# Altium PCB PCB4.PcbDoc (part 1 of 3)
Units mm, origin at the board's own origin, x right, y up, seen from the top; angles counter-clockwise.
Board outline 75.87 x 93.52 mm, 2 copper layers (Top Layer, Bottom Layer); 206 components, 153 nets, 707 pads, 254 vias.
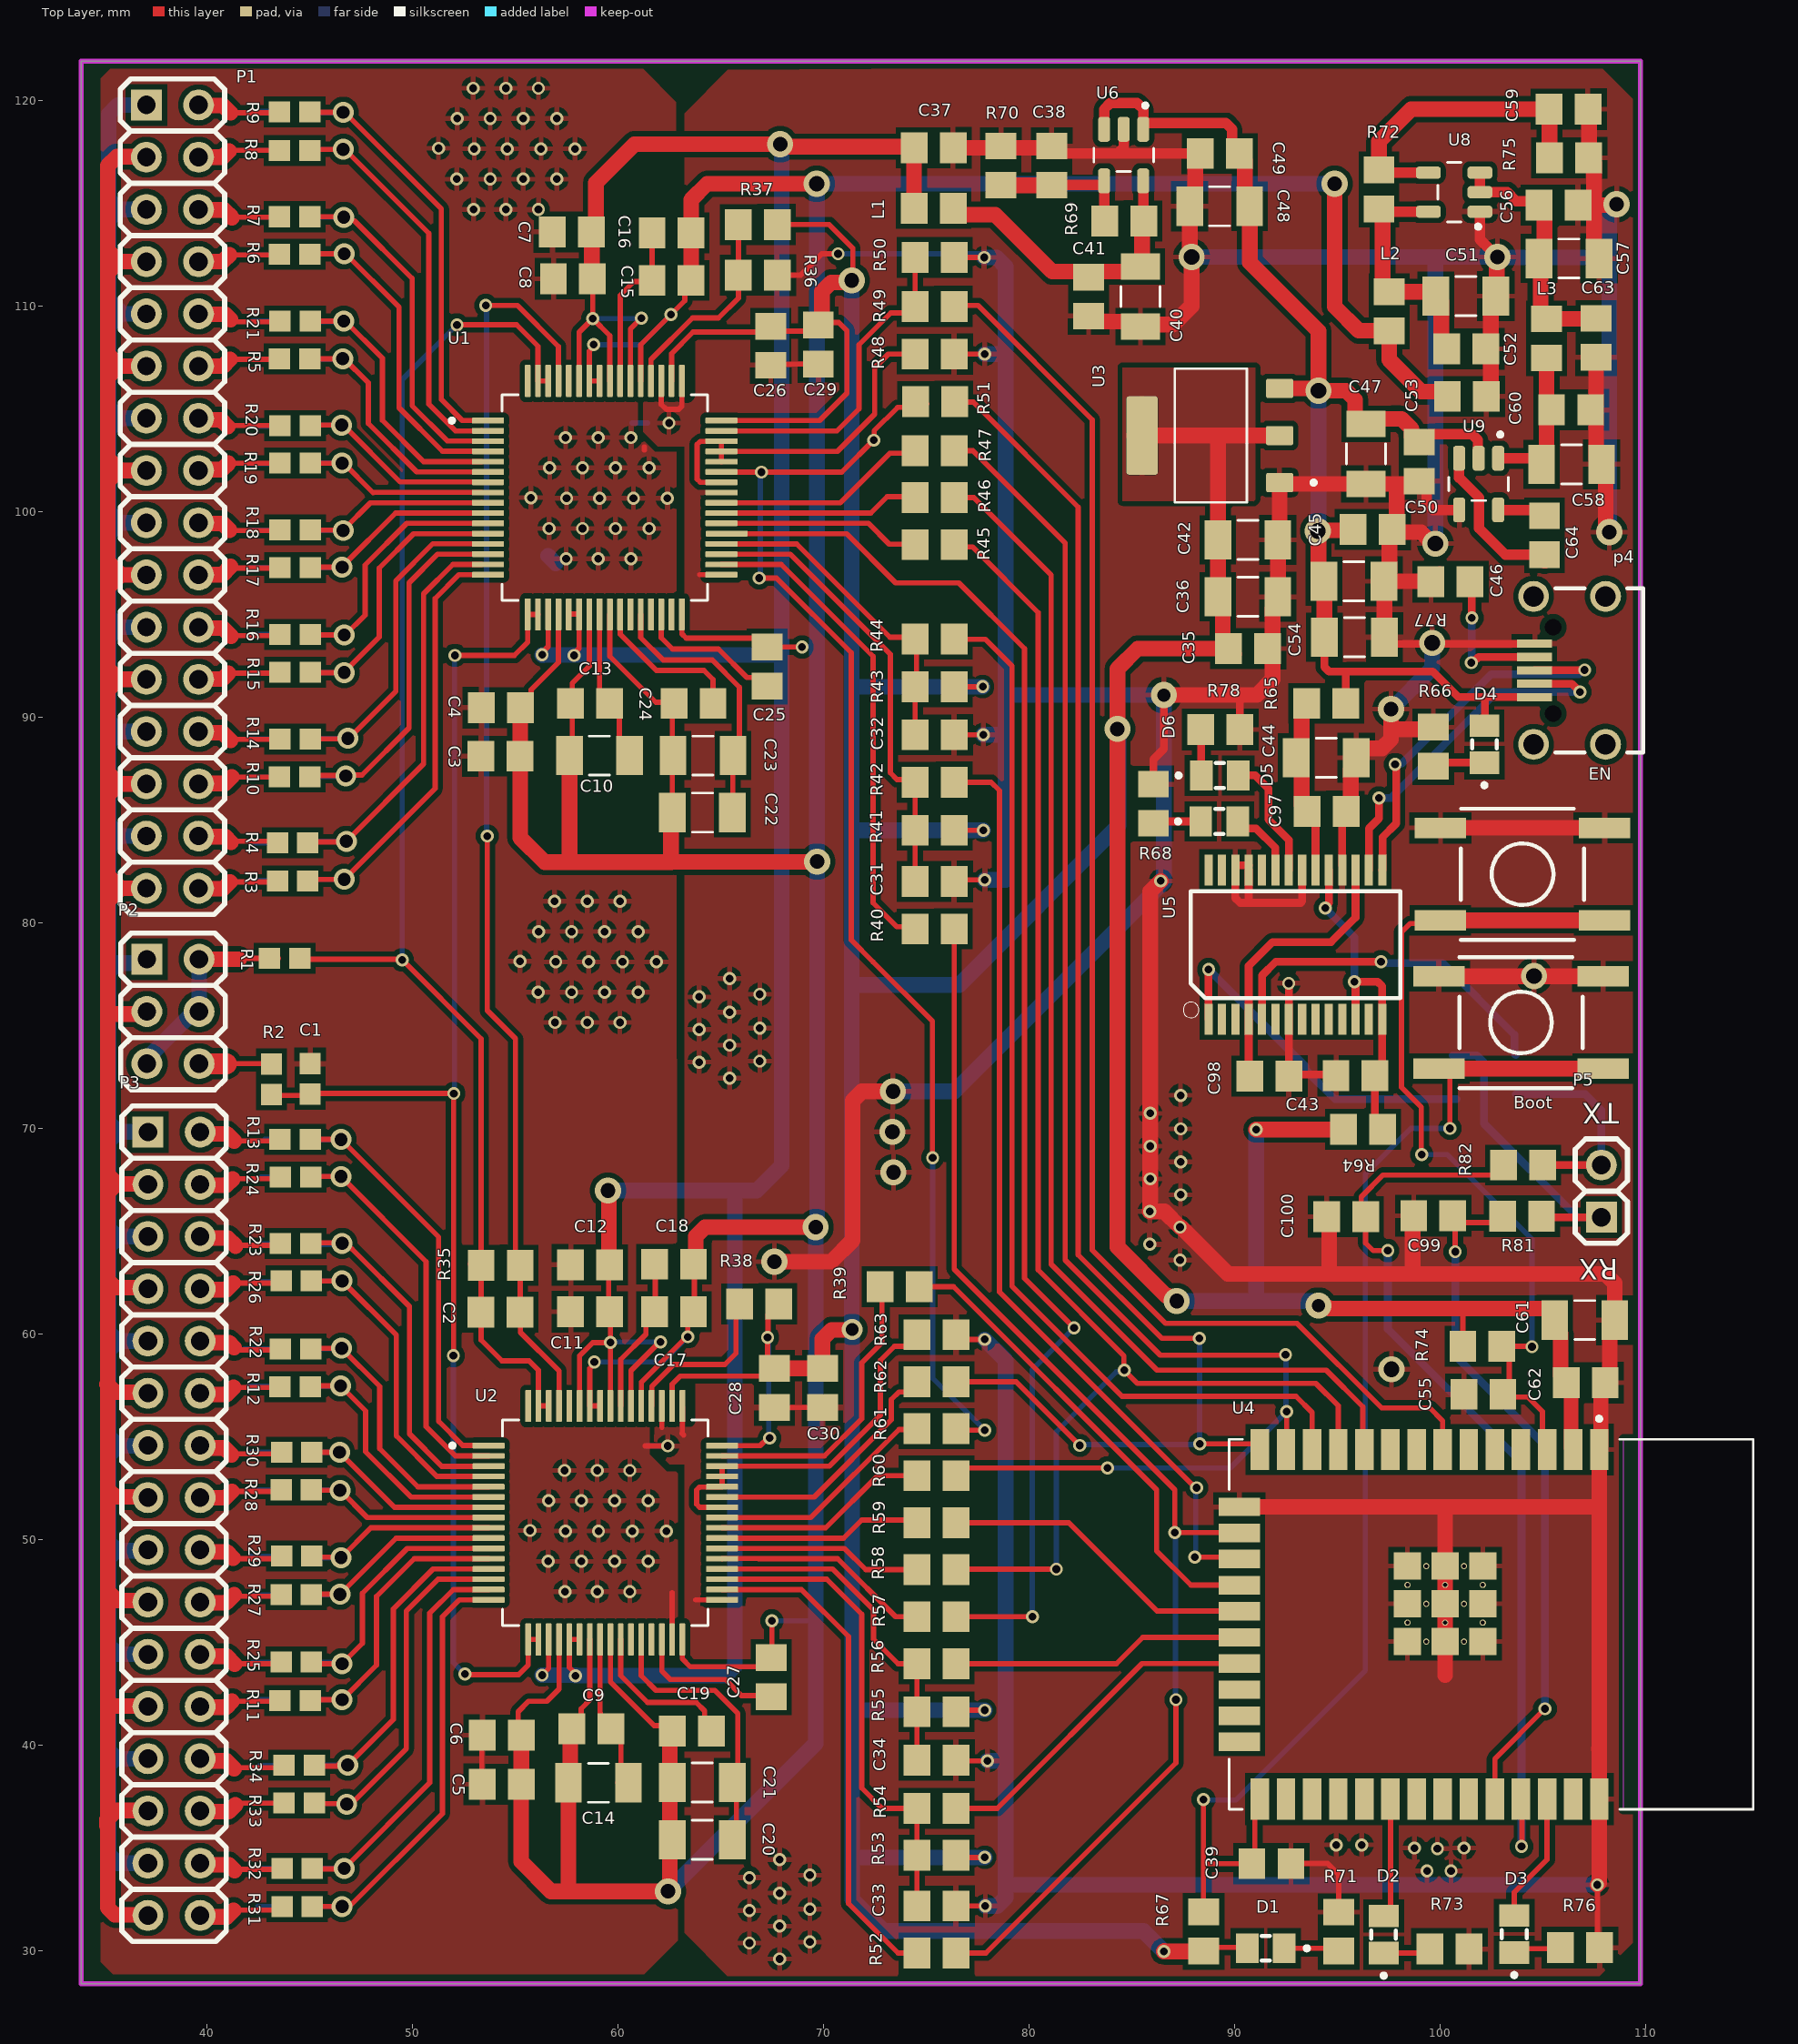
[diagram p0: Top Layer view]
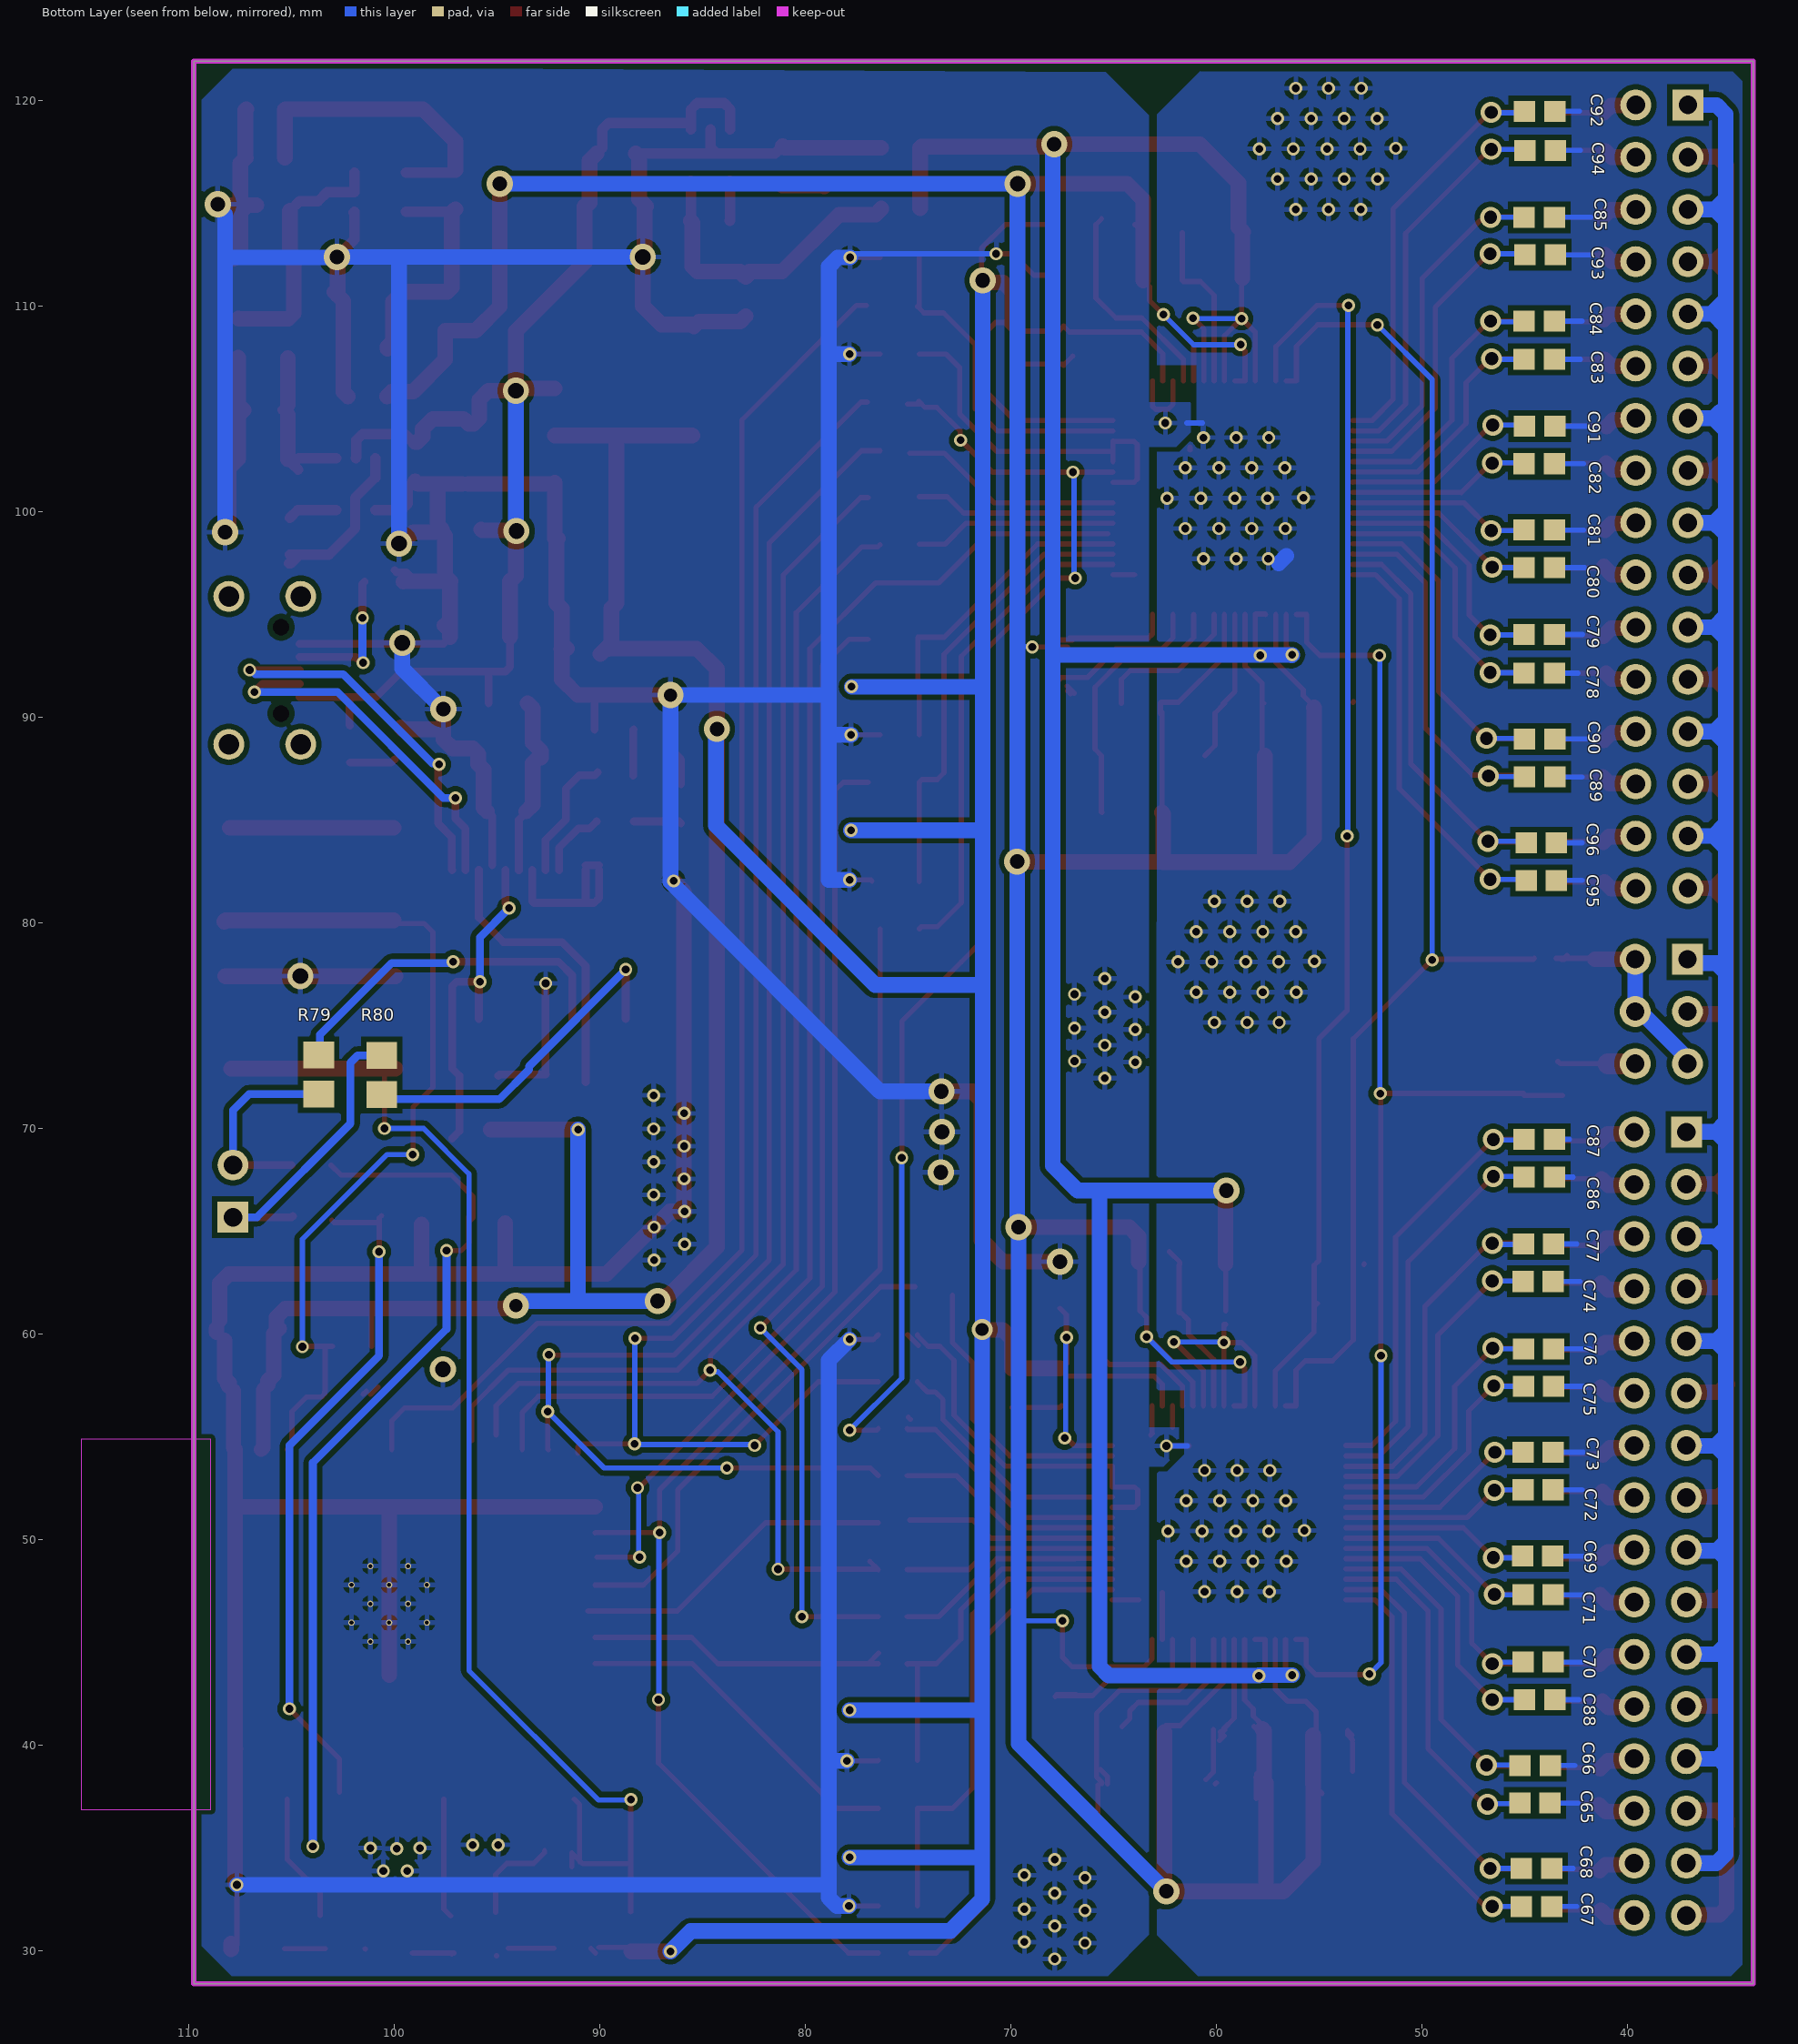
[diagram p1: Bottom Layer view, seen from below]

## Layer stack, top to bottom
Top Solder: solder mask 0.0102, Solder Resist, Dk 3.5
Top Layer: signal copper 0.0356
Dielectric 1: dielectric 0.32, FR-4, Dk 4.8
Bottom Layer: signal copper 0.0356
Bottom Solder: solder mask 0.0102, Solder Resist, Dk 3.5

## Board outline
33.884,28.372 33.884,121.895 109.753,121.895 109.753,28.372

## Design rules (kind name [scope] priority, off if disabled: settings)
Clearance [All] p1: gap=0.254 ignorepadtopadclearanceinfootprint=FALSE except(0: Arc-Hole Track-Hole SMDPad-Hole THPad-Hole Via-Hole Fill-Hole Poly-Hole Region-Hole Text-Hole)
PlaneConnect [InNet('GND')] p1: planeconnectstyle=Relief reliefexpansion=0.508 reliefentries=2 reliefconductorwidth=0.254 reliefairgap=0.254
PolygonConnect [InNet('GND')] p1: connectstyle=Relief reliefconductorwidth=0.254 reliefentries=4 polygonreliefangle="90 Angle" airgapwidth=0.254
RoutingVias [All] p1: holewidth=0.711 width=1.27 viastyle="Through Hole" minholewidth=0.381 minwidth=0.635 maxholewidth=0.711 maxwidth=1.27
SolderMaskExpansion [All] p1: expansion=0.102 istentingtop=FALSE
Width [All] p1: maxlimit=1.016 minlimit=0.254 preferedwidth=0.254 minimp=50.000000 maximp=50.000000 favimp=50.000000
29 further rules are at their usual default settings.

## Components (designator, comment, footprint, x,y, rotation, side; value= is the part's Value field where it differs from the comment)
Boot "SW-PB" SW-PB 103.937,75.133 r0 top
C1 "4.7nF" RESC1607X60N 45.034,72.392 r90 top
C2 "0.1uF" CAPC2012X135N 54.28,61.036 r0 top
C3 "1uF" CAPC2012X135N 54.28,88.087 r180 top
C4 "0.1uF" CAPC2012X135N 54.305,90.449 r180 top
C5 "0.1uF" CAPC2012X135N 54.348,38.078 r180 top
C6 "1uF" CAPC2012X135N 54.348,40.466 r180 top
C7 "1uF" CAPC2012X135N 57.76,113.589 r180 top
C8 "0.1uF" CAPC2012X135N 57.81,111.303 r180 top
C9 "10uF" CAPC3216X190N 59.055,38.151 r180 top
C10 "10uF" CAPC3216X190N 59.106,88.113 r180 top
C11 "1uF" CAPC2012X135N 58.647,61.062 r180 top
C12 "0.1uF" CAPC2012X135N 58.647,63.348 r180 top
C13 "0.1uF" CAPC2012X135N 58.649,90.653 r180 top
C14 "0.1uF" CAPC2012X135N 58.71,40.767 r180 top
C15 "0.1uF" CAPC2012X135N 62.611,111.227 r0 top
C16 "1uF" CAPC2012X135N 62.611,113.538 r0 top
C17 "0.1uF" CAPC2012X135N 62.728,61.062 r0 top
C18 "1uF" CAPC2012X135N 62.728,63.373 r0 top
C19 "1uF" CAPC2012X135N 63.602,40.665 r180 top
C20 "47uf" CAPC3216X190N 64.106,35.374 r180 top
C21 "47uf" CAPC3216X190N 64.106,38.168 r180 top
C22 "47uf" CAPC3216X190N 64.11,85.344 r180 top
C23 "47uf" CAPC3216X190N 64.135,88.113 r180 top
C24 "1uF" CAPC2012X135N 63.678,90.653 r180 top
C25 "1uF" CAPC2012X135N 67.259,92.446 r90 top
C26 "1uF" CAPC2012X135N 67.437,108.052 r270 top
C27 "1uF" CAPC2012X135N 67.462,43.282 r90 top
C28 "1uF" CAPC2012X135N 67.615,57.353 r270 top
C29 "0.1uF" CAPC2012X135N 69.748,108.102 r270 top
C30 "0.1uF" CAPC2012X135N 69.952,57.353 r270 top
C31 "0.1uF" CAPC2012X135N 75.413,81.991 r0 top
C32 "0.1uF" CAPC2012X135N 75.413,89.129 r0 top
C33 "0.1uF" CAPC2012X135N 75.504,32.156 r0 top
C34 "0.1uF" CAPC2012X135N 75.504,39.243 r0 top
C35 "0.1uf" CAPC2012X135N 90.653,93.32 r0 top
C36 "10uf" CAPC3216X190N 90.653,95.834 r180 top
C37 "0.1uf" CAPC2012X135N 75.362,117.678 r0 top
C38 "1uf" CAPC2012X135N 81.102,116.815 r90 top
C39 "100nf" CAPC2012X135N 91.796,34.214 r180 top
C40 "10uf" CAPC3216X190N 85.42,110.439 r90 top
C41 "1uf" CAPC2012X135N 82.906,110.439 r270 top
C42 "47uf" CAPC3216X190N 90.653,98.603 r180 top
C43 "100nf" CAPC2012X135N 95.885,72.542 r0 top
C44 "10uf" CAPC3216X190N 94.463,88.011 r0 top
C45 "0.1uf" CAPC2012X135N 96.723,99.111 r0 top
C46 "47uf" CAPC3216X190N 95.809,96.596 r180 top
C47 "10uf" CAPC3216X190N 96.393,102.794 r90 top
C48 "10uf" CAPC3216X190N 89.281,114.833 r0 top
C49 "1uf" CAPC2012X135N 89.281,117.399 r180 top
C50 "1uf" CAPC2012X135N 98.984,102.413 r270 top
C51 "10uf" CAPC3216X190N 101.255,110.465 r180 top
C52 "1uf" CAPC2012X135N 101.28,107.899 r0 top
C53 "0.1uf" CAPC2012X135N 101.305,105.588 r0 top
C54 "10uf" CAPC3216X190N 95.834,93.878 r180 top
C55 "100nf" CAPC2012X135N 102.108,57.048 r0 top
C56 "1uf" CAPC2012X135N 105.766,114.884 r0 top
C57 "10uf" CAPC3216X190N 106.274,112.293 r180 top
C58 "10uf" CAPC3216X190N 106.401,102.286 r180 top
C59 "1uf" CAPC2012X135N 106.248,119.558 r0 top
C60 "1uf" CAPC2012X135N 106.375,104.927 r0 top
C61 "22uf" CAPC3216X190N 107.036,60.655 r0 top
C62 "100nf" CAPC2012X135N 107.086,57.607 r180 top
C63 "0.1uf" CAPC2012X135N 107.594,108.433 r270 top
C64 "1uf" CAPC2012X135N 105.08,98.831 r270 top
C65 "4.7nF" RESC1607X60N 44.501,37.16 r0 bottom
C66 "4.7nF" RESC1607X60N 44.498,38.989 r180 bottom
C67 "4.7nF" RESC1607X60N 44.425,32.131 r0 bottom
C68 "4.7nF" RESC1607X60N 44.425,33.985 r180 bottom
C69 "4.7nF" RESC1607X60N 44.374,49.174 r180 bottom
C70 "4.7nF" RESC1607X60N 44.35,44.018 r180 bottom
C71 "4.7nF" RESC1607X60N 44.348,47.295 r0 bottom
C72 "4.7nF" RESC1607X60N 44.348,52.4 r0 bottom
C73 "4.7nF" RESC1607X60N 44.348,54.229 r180 bottom
C74 "4.7nF" RESC1607X60N 44.347,62.535 r0 bottom
C75 "4.7nF" RESC1607X60N 44.323,57.429 r0 bottom
C76 "4.7nF" RESC1607X60N 44.323,59.258 r180 bottom
C77 "4.7nF" RESC1607X60N 44.323,64.364 r180 bottom
C78 "4.7nF" RESC1607X60N 44.298,92.126 r0 bottom
C79 "4.7nF" RESC1607X60N 44.298,94.005 r180 bottom
C80 "4.7nF" RESC1607X60N 44.298,97.257 r0 bottom
C81 "4.7nF" RESC1607X60N 44.298,99.085 r180 bottom
C82 "4.7nF" RESC1607X60N 44.298,102.311 r0 bottom
C83 "4.7nF" RESC1607X60N 44.298,107.391 r0 bottom
C84 "4.7nF" RESC1607X60N 44.298,109.245 r180 bottom
C85 "4.7nF" RESC1607X60N 44.298,114.3 r180 bottom
C86 "4.7nF" RESC1607X60N 44.296,67.615 r0 bottom
C87 "4.7nF" RESC1607X60N 44.296,69.444 r180 bottom
C88 "4.7nF" RESC1607X60N 44.272,42.189 r0 bottom
C89 "4.7nF" RESC1607X60N 44.272,87.071 r0 bottom
C90 "4.7nF" RESC1607X60N 44.272,88.925 r180 bottom
C91 "4.7nF" RESC1607X60N 44.272,104.14 r180 bottom
C92 "4.7nF" RESC1607X60N 44.272,119.456 r180 bottom
C93 "4.7nF" RESC1607X60N 44.247,112.471 r0 bottom
C94 "4.7nF" RESC1607X60N 44.247,117.551 r0 bottom
C95 "4.7nF" RESC1607X60N 44.196,82.042 r0 bottom
C96 "4.7nF" RESC1607X60N 44.196,83.871 r180 bottom
C97 "100nf" CAPC2012X135N 94.488,85.395 r180 top
C98 "100nf" CAPC2012X135N 91.694,72.517 r180 top
C99 "100nf" CAPC2012X135N 99.67,65.735 r0 top
C100 "100nf" CAPC2012X135N 95.428,65.684 r0 top
D1 "SML-LXT0805IW-TR" LEDC2012X120N 91.516,30.099 r180 top
D2 "SML-LXT0805IW-TR" LEDC2012X120N 97.257,30.77 r90 top
D3 "SML-LXT0805IW-TR" LEDC2012X120N 103.61,30.796 r90 top
D4 "SML-LXT0805IW-TR" LEDC2012X120N 102.159,88.671 r90 top
D5 "SML-LXT0805IW-TR" LEDC2012X120N 89.256,84.912 r0 top
D6 "SML-LXT0805IW-TR" LEDC2012X120N 89.281,87.147 r0 top
EN "SW-PB" SW-PB 104.013,82.347 r0 top
L1 "3.3uH" CAPC2012X135N 75.362,114.732 r180 top
L2 "3.3uH" CAPC2012X135N 97.521,109.728 r270 top
L3 "3.3uf" CAPC2012X135N 105.181,108.407 r90 top
P1 "MHDR_2X16" "MHDR2X16-254P - E" 37.059,119.761 r270 top
P2 "MHDR_2X03" "MHDR2X03-254P - E" 37.084,78.207 r270 top
P3 "MHDR_2X16" "MHDR2X16-254P - E" 37.135,69.799 r270 top
p4 "USB Connector" PCBComponent_1 106.54,92.049 r180 top
P5 "MHDR_1X02" MHDR1X02-254P 107.848,65.659 r90 top
R1 "4.99K" RESC1607X60N 43.79,78.257 r180 top
R2 "4.99K" RESC1607X60N 43.155,72.365 r90 top
R3 "4.99K" RESC1607X60N 44.171,82.017 r180 top
R4 "4.99K" RESC1607X60N 44.171,83.871 r180 top
R5 "4.99K" RESC1607X60N 44.272,107.417 r180 top
R6 "4.99K" RESC1607X60N 44.272,112.497 r180 top
R7 "4.99K" RESC1607X60N 44.272,114.325 r180 top
R8 "4.99K" RESC1607X60N 44.272,117.551 r180 top
R9 "4.99K" RESC1607X60N 44.272,119.431 r180 top
R10 "4.99K" RESC1607X60N 44.274,87.071 r180 top
R11 "4.99K" RESC1607X60N 44.296,42.139 r180 top
R12 "4.99K" RESC1607X60N 44.296,57.404 r180 top
R13 "4.99K" RESC1607X60N 44.296,69.444 r180 top
R14 "4.99K" RESC1607X60N 44.298,88.925 r180 top
R15 "4.99K" RESC1607X60N 44.298,92.177 r180 top
R16 "4.99K" RESC1607X60N 44.298,94.005 r180 top
R17 "4.99K" RESC1607X60N 44.298,97.257 r180 top
R18 "4.99K" RESC1607X60N 44.298,99.085 r180 top
R19 "4.99K" RESC1607X60N 44.298,102.337 r180 top
R20 "4.99K" RESC1607X60N 44.298,104.165 r180 top
R21 "4.99K" RESC1607X60N 44.298,109.245 r180 top
R22 "4.99K" RESC1607X60N 44.321,59.258 r180 top
R23 "4.99K" RESC1607X60N 44.321,64.389 r180 top
R24 "4.99K" RESC1607X60N 44.321,67.615 r180 top
R25 "4.99K" RESC1607X60N 44.345,44.018 r180 top
R26 "4.99K" RESC1607X60N 44.345,62.56 r180 top
R27 "4.99K" RESC1607X60N 44.347,47.295 r180 top
R28 "4.99K" RESC1607X60N 44.347,52.4 r180 top
R29 "4.99K" RESC1607X60N 44.372,49.174 r180 top
R30 "4.99K" RESC1607X60N 44.372,54.229 r180 top
R31 "4.99K" RESC1607X60N 44.398,32.131 r180 top
R32 "4.99K" RESC1607X60N 44.398,33.985 r180 top
R33 "4.99K" RESC1607X60N 44.498,37.16 r180 top
R34 "4.99K" RESC1607X60N 44.499,39.014 r180 top
R35 "392K" CAPC2012X135N 54.295,63.322 r0 top
R36 "10K" CAPC2012X135N 66.802,111.481 r180 top
R37 "10K" CAPC2012X135N 66.812,113.944 r0 top
R38 "10K" CAPC2012X135N 66.878,61.443 r0 top
R39 "0R" CAPC2012X135N 73.711,62.281 r0 top
R40 "0R" CAPC2012X135N 75.413,79.68 r0 top
R41 "10K" CAPC2012X135N 75.413,84.48 r0 top
R42 "0R" CAPC2012X135N 75.413,86.817 r0 top
R43 "10K" CAPC2012X135N 75.413,91.465 r0 top
R44 "0R" CAPC2012X135N 75.413,93.777 r0 top
R45 "0R" CAPC2012X135N 75.413,98.374 r0 top
R46 "0R" CAPC2012X135N 75.413,100.66 r0 top
R47 "0R" CAPC2012X135N 75.413,102.946 r0 top
R48 "10K" CAPC2012X135N 75.413,107.645 r0 top
R49 "0R" CAPC2012X135N 75.413,109.957 r0 top
R50 "10K" CAPC2012X135N 75.413,112.344 r0 top
R51 "0R" CAPC2012X135N 75.438,105.334 r0 top
R52 "0R" CAPC2012X135N 75.504,29.87 r0 top
R53 "10K" CAPC2012X135N 75.504,34.62 r0 top
R54 "0R" CAPC2012X135N 75.504,36.906 r0 top
R55 "10K" CAPC2012X135N 75.504,41.605 r0 top
R56 "0R" CAPC2012X135N 75.504,43.942 r0 top
R57 "0R" CAPC2012X135N 75.504,46.228 r0 top
R58 "0R" CAPC2012X135N 75.504,48.514 r0 top
R59 "0R" CAPC2012X135N 75.504,50.8 r0 top
R60 "0R" CAPC2012X135N 75.504,53.086 r0 top
R61 "0R" CAPC2012X135N 75.504,55.372 r0 top
R62 "0R" CAPC2012X135N 75.504,57.658 r0 top
R63 "10K" CAPC2012X135N 75.504,59.944 r0 top
R64 "Res1" CAPC2012X135N 96.256,69.926 r180 top value=1k
R65 "0R" CAPC2012X135N 94.463,90.653 r0 top
R66 "Res1" CAPC2012X135N 99.67,88.544 r270 top value=1k
R67 "Res1" CAPC2012X135N 88.494,30.922 r270 top value=1k
R68 "Res1" CAPC2012X135N 86.055,85.776 r270 top value=1k
R69 "39.2k" CAPC2012X135N 84.633,114.122 r0 top
R70 "36.5k" CAPC2012X135N 78.638,116.815 r90 top
R71 "Res1" CAPC2012X135N 95.072,30.912 r270 top value=220R
R72 "52.56k" CAPC2012X135N 97.028,115.646 r270 top
R73 "Res1" CAPC2012X135N 100.457,30.059 r180 top value=220R
R74 "Res1" CAPC2012X135N 102.057,59.385 r180 top value=10K
R75 "47.44k" CAPC2012X135N 106.274,117.196 r0 top
R76 "Res1" CAPC2012X135N 106.81,30.135 r180 top value=220R
R77 "10K" CAPC2012X135N 100.508,96.571 r0 top
R78 "Res1" CAPC2012X135N 89.306,89.383 r180 top value=1k
R79 "0R" CAPC2012X135N 103.683,72.593 r270 bottom
R80 "0R" CAPC2012X135N 100.609,72.578 r90 bottom
R81 "0R" CAPC2012X135N 103.988,65.71 r0 top
R82 "0R" CAPC2012X135N 104.038,68.199 r0 top
U1 "ADS1299-6PAGR" QFP50P1200X1200X120-64N#1 59.36,100.66 r0 top
U2 "ADS1299-6PAGR" QFP50P1200X1200X120-64N#2 59.385,50.8 r0 top
U3 "AMS1117-3.3" SOT229P700X180-4N 88.849,103.683 r180 top
U4 "ESP32-WROOM-32" MODULE_ESP32-WROOM-32 102.487,45.856 r270 top
U5 "INTERFACE-FT232RL(SSOP28)" SSOP28-0.65-10.2X5.2MM 92.964,78.918 r0 top
U6 "TPS73225DBVR" SOT95P280X145-5N 84.607,117.323 r270 top
U8 "TPS72325DBVT" SOT95P280X145-5N 100.686,115.519 r180 top
U9 "TPS60403DBVT" SOT95P280X145-5N 101.879,101.321 r270 top

## Footprints (in the part's own frame and the unit in brackets; to place one, negate y for a bottom-side part, rotate by r counter-clockwise, add the part's x,y. Pads: shape width x height; smd on the part's side, far side on the other; paste and mask are expansions set on the pad)
CAPC2012X135N [mm]
  rect 1.3x1.5 smd: 1(-0.95,0) 2(0.95,0)
CAPC3216X190N [mm]
  rect 1.29x1.91 smd: 1(-1.46,0) 2(1.46,0)
  silkscreen extent -0.49,-0.95 0.49,0.95
LEDC2012X120N [mm]
  rect 1.1x1.45 smd: A(0.9,0) C(-0.9,0)
  silkscreen extent -2.1,-0.6 0.2,0.6, body extent -1,-0.65 1,0.65, height 0.9
MHDR1X02-254P [mm] "Male Header 1X02 with 2.54 mm Pitch"
  rect 1.5x1.5 hole 0.9: 1(0,0)
  round 1.5 hole 0.9: 2(2.54,0)
  silkscreen extent -1.27,-1.27 3.81,1.27, body extent -1.27,-1.27 3.81,1.27, height 8.43
"MHDR2X03-254P - E" [mm] "Male Header 2X03 with 2.54 mm Pitch"
  rect 1.5x1.5 hole 0.9: 1(0,0)
  round 1.5 hole 0.9: 2(0,2.54) 3(2.54,0) 4(2.54,2.54) 5(5.08,0) 6(5.08,2.54)
  silkscreen extent -1.27,-1.27 6.35,3.81, body extent -1.27,-1.27 6.35,3.81, height 8.43
"MHDR2X16-254P - E" [mm] "Male Header 2X16 with 2.54 mm Pitch"
  rect 1.5x1.5 hole 0.9: 1(0,0)
  round 1.5 hole 0.9: 2(0,2.54) 3(2.54,0) 4(2.54,2.54) 5(5.08,0) 6(5.08,2.54) 7(7.62,0) 8(7.62,2.54) 9(10.16,0) 10(10.16,2.54) 11(12.7,0) 12(12.7,2.54) 13(15.24,0) 14(15.24,2.54) 15(17.78,0) 16(17.78,2.54) 17(20.32,0) 18(20.32,2.54) 19(22.86,0) 20(22.86,2.54) 21(25.4,0) 22(25.4,2.54) 23(27.94,0) 24(27.94,2.54) 25(30.48,0) 26(30.48,2.54) 27(33.02,0) 28(33.02,2.54) 29(35.56,0) 30(35.56,2.54) 31(38.1,0) 32(38.1,2.54)
  silkscreen extent -1.27,-1.27 39.37,3.81, body extent -1.27,-1.27 39.37,3.81, height 8.43
MODULE_ESP32-WROOM-32 [mm]
  rect 2x0.9 smd: 1(-8.5,5.26) 2(-8.5,3.99) 3(-8.5,2.72) 4(-8.5,1.45) 5(-8.5,0.18) 6(-8.5,-1.09) 7(-8.5,-2.36) 8(-8.5,-3.63) 9(-8.5,-4.9) 10(-8.5,-6.17) 11(-8.5,-7.44) 12(-8.5,-8.71) 13(-8.5,-9.98) 14(-8.5,-11.25) 25(8.5,-11.25) 26(8.5,-9.98) 27(8.5,-8.71) 28(8.5,-7.44) 29(8.5,-6.17) 30(8.5,-4.9) 31(8.5,-3.63) 32(8.5,-2.36) 33(8.5,-1.09) 34(8.5,0.18) 35(8.5,1.45) 36(8.5,2.72) 37(8.5,3.99) 38(8.5,5.26)
  rect 0.9x2 smd: 15(-5.715,-12.25) 16(-4.445,-12.25) 17(-3.175,-12.25) 18(-1.905,-12.25) 19(-0.635,-12.25) 20(0.635,-12.25) 21(1.905,-12.25) 22(3.175,-12.25) 23(4.445,-12.25) 24(5.715,-12.25)
  rect 1.33x1.33 smd: 39_1(-2.835,-0.405) 39_2(-1,-0.405) 39_3(0.835,-0.405) 39_4(-2.835,-2.24) 39_5(-1,-2.24) 39_6(0.835,-2.24) 39_7(-2.835,-4.075) 39_8(-1,-4.075) 39_9(0.835,-4.075)
  round 0.3 hole 0.2: 39_10(-1.917,-0.405) 39_11(-0.082,-0.405) 39_12(-2.835,-1.322) 39_13(-1,-1.322) 39_14(0.835,-1.322) 39_15(-1.917,-2.24) 39_16(-0.082,-2.24) 39_17(-2.835,-3.157) 39_18(-1,-3.157) 39_19(0.835,-3.157) 39_20(-1.917,-4.075) 39_21(-0.082,-4.075)
  Keep-Out Layer region: 9,6.45 -9,6.45 -9,12.75 9,12.75
  Keep-Out Layer region: 9,6.45 -9,6.45 -9,12.75 9,12.75
  silkscreen extent -10.1,-12.75 9,12.75, body extent -9,-12.75 9,12.75, height 3.2
PCBComponent_1 [mm]
  rect 0x0 hole 0.8: 0(1.038,-2.311) 0(1.038,1.889)
  round 1.5 hole 1: 6(-1.512,3.389) 6(-1.512,-3.811) 6(1.988,-3.811) 6(1.988,3.389)
  rect 1.7x0.4 smd: D+(1.938,-0.211) D-(1.938,0.439) G(1.938,-1.511) ID(1.938,-0.861) VBUS(1.938,1.089)
  silkscreen extent -3.34,-4.21 0.94,3.79, body extent -3.98,-4.26 2.63,3.75, height 2.71
QFP50P1200X1200X120-64N#1 [mm]
  rrect25% 1.56x0.28 smd: 1(-5.68,3.75) 2(-5.68,3.25) 3(-5.68,2.75) 4(-5.68,2.25) 5(-5.68,1.75) 6(-5.68,1.25) 7(-5.68,0.75) 8(-5.68,0.25) 9(-5.68,-0.25) 10(-5.68,-0.75) 11(-5.68,-1.25) 12(-5.68,-1.75) 13(-5.68,-2.25) 14(-5.68,-2.75) 15(-5.68,-3.25) 16(-5.68,-3.75) 33(5.68,-3.75) 34(5.68,-3.25) 35(5.68,-2.75) 36(5.68,-2.25) 38(5.68,-1.25) 39(5.68,-0.75) 40(5.68,-0.25) 41(5.68,0.25) 42(5.68,0.75) 43(5.68,1.25) 44(5.68,1.75) 45(5.68,2.25) 46(5.68,2.75) 47(5.68,3.25) 48(5.68,3.75)
  rrect25% 0.28x1.56 smd: 17(-3.75,-5.68) 18(-3.25,-5.68) 19(-2.75,-5.68) 20(-2.25,-5.68) 21(-1.75,-5.68) 22(-1.25,-5.68) 23(-0.75,-5.68) 24(-0.25,-5.68) 25(0.25,-5.68) 26(0.75,-5.68) 27(1.25,-5.68) 28(1.75,-5.68) 29(2.25,-5.68) 30(2.75,-5.68) 31(3.25,-5.68) 32(3.75,-5.68) 49(3.75,5.68) 50(3.25,5.68) 51(2.75,5.68) 52(2.25,5.68) 53(1.75,5.68) 54(1.25,5.68) 55(0.75,5.68) 56(0.25,5.68) 57(-0.25,5.68) 58(-0.75,5.68) 59(-1.25,5.68) 60(-1.75,5.68) 61(-2.25,5.68) 62(-2.75,5.68) 63(-3.25,5.68) 64(-3.75,5.68)
  rrect25% 2.032x0.28 smd: 37(5.934,-1.75)
  silkscreen extent -7.54,-5 5,5, body extent -6,-6 6,6, height 1.2
QFP50P1200X1200X120-64N#2 [mm]
  rrect25% 1.56x0.28 smd: 1(-5.68,3.75) 2(-5.68,3.25) 3(-5.68,2.75) 4(-5.68,2.25) 5(-5.68,1.75) 6(-5.68,1.25) 7(-5.68,0.75) 8(-5.68,0.25) 9(-5.68,-0.25) 10(-5.68,-0.75) 11(-5.68,-1.25) 12(-5.68,-1.75) 13(-5.68,-2.25) 14(-5.68,-2.75) 15(-5.68,-3.25) 16(-5.68,-3.75) 33(5.68,-3.75) 34(5.68,-3.25) 35(5.68,-2.75) 36(5.68,-2.25) 37(5.68,-1.75) 38(5.68,-1.25) 39(5.68,-0.75) 40(5.68,-0.25) 41(5.68,0.25) 42(5.68,0.75) 43(5.68,1.25) 44(5.68,1.75) 45(5.68,2.25) 46(5.68,2.75) 47(5.68,3.25) 48(5.68,3.75)
  rrect25% 0.28x1.56 smd: 17(-3.75,-5.68) 18(-3.25,-5.68) 19(-2.75,-5.68) 20(-2.25,-5.68) 21(-1.75,-5.68) 22(-1.25,-5.68) 23(-0.75,-5.68) 24(-0.25,-5.68) 25(0.25,-5.68) 26(0.75,-5.68) 27(1.25,-5.68) 28(1.75,-5.68) 29(2.25,-5.68) 30(2.75,-5.68) 31(3.25,-5.68) 32(3.75,-5.68) 49(3.75,5.68) 50(3.25,5.68) 51(2.75,5.68) 52(2.25,5.68) 53(1.75,5.68) 54(1.25,5.68) 55(0.75,5.68) 56(0.25,5.68) 57(-0.25,5.68) 58(-0.75,5.68) 59(-1.25,5.68) 60(-1.75,5.68) 61(-2.25,5.68) 62(-2.75,5.68) 63(-3.25,5.68) 64(-3.75,5.68)
  silkscreen extent -7.54,-5 5,5, body extent -6,-6 6,6, height 1.2
RESC1607X60N [mm]
  rect 1.04x1.02 smd: 1(-0.735,0) 2(0.735,0)
SOT95P280X145-5N [mm]
  rrect50% 1.21x0.59 smd: 1(-1.255,0.95) 2(-1.255,0) 3(-1.255,-0.95) 4(1.255,-0.95) 5(1.255,0.95)
  silkscreen extent -2.51,-1.45 0.8,1.45, body extent -1.4,-1.45 1.4,1.45, height 1.45
SOT229P700X180-4N [mm]
  rrect15% 1.31x0.93 smd: 1(-3.345,2.29) 2(-3.345,0) 3(-3.345,-2.29)
  rrect15% 1.524x3.81 smd: 4(3.345,0)
  silkscreen extent -5.1,-3.25 1.75,3.25, body extent -3.5,-3.25 3.5,3.25, height 1.8
SSOP28-0.65-10.2X5.2MM [mm]
  rect 0.4x1.5 smd: 1(-4.225,-3.625) 2(-3.575,-3.625) 3(-2.925,-3.625) 4(-2.275,-3.625) 5(-1.625,-3.625) 6(-0.975,-3.625) 7(-0.325,-3.625) 8(0.325,-3.625) 10(1.625,-3.625) 11(2.275,-3.625) 12(2.925,-3.625) 13(3.575,-3.625) 14(4.225,-3.625) 15(4.225,3.625) 16(3.575,3.625) 17(2.925,3.625) 18(2.275,3.625) 19(1.625,3.625) 20(0.975,3.625) 21(0.325,3.625) 22(-0.325,3.625) 22(0.975,-3.625) 23(-0.975,3.625) 24(-1.625,3.625) 25(-2.275,3.625) 26(-2.925,3.625) 27(-3.575,3.625) 28(-4.225,3.625)
  silkscreen extent -5.46,-3.56 5.1,2.6, body extent -5.1,-3.9 5.1,3.9, height 2
SW-PB [mm]
  rect 2.5x1 smd: 1(-3.992,2.25) 2(-3.992,-2.25) 3(3.992,2.25) 4(3.992,-2.25)
  silkscreen extent -3,-3.2 3,3.17, body extent -4.5,-3 4.5,3, height 5

## Part data
Boot EN: "Switch", LatestRevisionDate=17-Jul-2002, LatestRevisionNote="Re-released for DXP Platform.", PackageDescription="Switch; 2 Leads", PackageReference=SPST-2, Published=24-Mar-1999, Publisher="Altium Limited"
C1 C2 C3 C4 C5 C6 C7 C8 C9 C10 C11 C12 C13 C14 C15 C16 C17 C18 C19 C20 C21 C22 C23 C24 C25 C26 C27 C28 C29 C30 C31 C32 C33 C34 C35 C37 C38 C41 C45 C49 C50 C52 C53 C56 C59 C60 C63 C64 C65 C66 C67 C68 C69 C70 C71 C72 C73 C74 C75 C76 C77 C78 C79 C80 C81 C82 C83 C84 C85 C86 C87 C88 C89 C90 C91 C92 C93 C94 C95 C96: library part GRM21BR71C105KA01K, "SMD Capacitor X7R(EIA) with Capacitance: 1.0uF Tol. 10%. Rated Voltage: 16Vdc", Package="0805 Murata", BuyPart=https://www.snapeda.com/parts/GRM21BR71C105KA01K/Murata%20Electronics%20North%20America/view-part/1149186/?ref=eda, Digi-Key_Part_Number=490-11597-1-ND, DigiKey-Purchase-URL=https://snapeda.com/shop?store=DigiKey&id=1149186, MF=Murata, Mouser-Purchase-URL=https://snapeda.com/shop?store=Mouser&id=1149186, MP=GRM21BR71C105KA01K, SnapEDA_Link=https://www.snapeda.com/parts/GRM21BR71C105KA01K/Murata%20Electronics%20North%20America/view-part/1149186/?ref=snap
C36 C40 C42 C46 C47 C48 C51 C54 C57 C58: library part GRM31CD71H106KE11K, "SMD Capacitor X7T(EIA) with Capacitance: 10uF Tol. 10%. Rated Voltage: 50Vdc", Package=None, Availability=Unavailable, MP=GRM31CD71H106KE11K, Price=None
C39 C43 C55 C62 C97 C98 C99 C100: library part VJ0805D390MXCAP, Package=None, Availability=Unavailable, MP=VJ0805D390MXCAP, Price=None
C44 C61: library part C1206C106K3RACTU, "10ÂµF Â±10% 25V Ceramic Capacitor X7R 1206 _3216 Metric_", Package="1206 KEMET", Digi-Key_Part_Number=399-7442-1-ND, Digi-Key_Purchase_URL=https://www.digikey.com/product-detail/en/kemet/C1206C106K3RACTU/399-7442-1-ND/3317476?utm_source=snapeda&utm_medium=aggregator&utm_campaign=symbol, MF=KEMET, MP=C1206C106K3RACTU, SnapEDA_Link=https://www.snapeda.com/parts/C1206C106K3RACTU/KEMET/view-part/1755641/?ref=snap
D1 D2 D3 D4 D5 D6: "LED;Red;11mcd;0.061In.Dia.;SMD;100mA;2V Vf;635nm;140deg;SMD;White Diffused;5V Vr", Package="0805 Lumex", Check_prices=https://www.snapeda.com/parts/SML-LXT0805IW-TR/Lumex+Opto%252FComponents+Inc./view-part/?ref=eda, MF="Lumex Opto/Components", MP=SML-LXT0805IW-TR, SnapEDA_Link=https://www.snapeda.com/parts/SML-LXT0805IW-TR/Lumex+Opto%252FComponents+Inc./view-part/?ref=snap
L1 L2 L3: library part "INDUCTOR SMD"
P1 P3: "Male Header 2X16"
P2: "Male Header 2X03"
p4: library part "USB AB MICRO CONNECTOR", "USB MICRO-B Type Connector", Max Current=1600mA, Category=Connector, ComponentLink1Description=Datasheet, ComponentLink2Description=Reference, Designer="ABBAS BASEREH", Mounting Technology="Surface Mount\Through-Hole", Pin Count=5-7, Publisher="ABBAS BASEREH", Status=Unreleased, Update=1395-11-17
P5: "Male Header 1X02"
R1 R2 R3 R4 R5 R6 R7 R8 R9 R10 R11 R12 R13 R14 R15 R16 R17 R18 R19 R20 R21 R22 R23 R24 R25 R26 R27 R28 R29 R30 R31 R32 R33 R34 R35: library part 10K, "1.8W"
R36 R37 R38 R41 R43 R48 R50 R53 R55 R63: "1.8W"
R39 R40 R42 R44 R45 R46 R47 R49 R51 R52 R54 R56 R57 R58 R59 R60 R61 R62 R65 R69 R70 R72 R75 R77 R79 R80 R81 R82: library part "RES 0805 0.125W", "RES 0805", Data=16-12-2016, Desc.="RES SMD 0805", Designer="Abbas Basereh"
R64 R66 R67 R68 R71 R73 R74 R76 R78: "Resistor", LatestRevisionDate=17-Jul-2002, LatestRevisionNote="Re-released for DXP Platform.", PackageDescription="Axial Device, Thru-Hole; 2 Leads; 0.3 in Pin Spacing", PackageReference=AXIAL-0.3, Published=8-Jun-2000, Publisher="Altium Limited"
U1 U2: "Low-Noise, 6-Channel, 24-Bit Analog-to-Digital Converter for Biopotential Measurements 64-TQFP -40 to 85", Package="TQFP-64 Texas Instruments", Availability=Warning, Check_prices=https://www.snapeda.com/parts/ADS1299-6PAGR/Texas%20Instruments/view-part/1219452/?ref=eda, MF="Texas Instruments", MP=ADS1299-6PAGR, Price=None, Purchase-URL=https://pricing.snapeda.com/search/part/ADS1299-6PAGR/?ref=eda, SnapEDA_Link=https://www.snapeda.com/parts/ADS1299-6PAGR/Texas%20Instruments/view-part/1219452/?ref=snap
U3: "Sot223/Pkg 1-Amp 3.3-Volt Low Drop Out Voltage Regulatator", Package="SOT-223 Seeed Technology", Availability="Not in stock", Check_prices=https://www.snapeda.com/parts/AMS1117-3.3/Advanced+Monolithic+Systems/view-part/?ref=eda, MF="Advanced Monolithic Systems", MP=AMS1117-3.3, Price=None, SnapEDA_Link=https://www.snapeda.com/parts/AMS1117-3.3/Advanced+Monolithic+Systems/view-part/?ref=snap
U4: "Bluetooth, WiFi 802.11b/g/n, Bluetooth v4.2 +EDR, Class 1, 2 and 3 Transceiver Module 2.4GHz ~ 2.5GHz Antenna Not Included, U.FL Surface Mount", Package="Module Espressif Systems", Availability="In Stock", Check_prices=https://www.snapeda.com/parts/ESP32-WROOM-32/Espressif+Systems/view-part/?ref=eda, MF="Espressif Systems", MP=ESP32-WROOM-32, Price=None, Purchase-URL=https://pricing.snapeda.com/search/part/ESP32-WROOM-32/?ref=eda, SnapEDA_Link=https://www.snapeda.com/parts/ESP32-WROOM-32/Espressif+Systems/view-part/?ref=snap
U5: "USB-Ð¼Ð¾ÑÑ‚, Ð¸Ð½Ñ‚ÐµÑ€Ñ„ÐµÐ¹Ñ USB Ðº UART USB 2.0 UART 28-SSOP", Package="SSOP-28 FTDI", Availability="Not in stock", Check_prices=https://www.snapeda.com/parts/FT232RL/FTDI%252C+Future+Technology+Devices+International+Ltd/view-part/?ref=eda, MF="FTDI, Future", MP=FT232RL, Price=None, SnapEDA_Link=https://www.snapeda.com/parts/FT232RL/FTDI%252C+Future+Technology+Devices+International+Ltd/view-part/?ref=snap
U6: "250-mA, high-accuracy, ultra-low-dropout voltage regulator with reverse current protection & enable 5-SOT-23 -40 to 125", Package="SOT-23-5 Texas Instruments", Availability=Unavailable, Check_prices=https://www.snapeda.com/parts/TPS73225DBVR/Texas%20Instruments/view-part/1237159/?ref=eda, MF="Texas Instruments", MP=TPS73225DBVR, Price=None, Purchase-URL=https://pricing.snapeda.com/search/part/TPS73225DBVR/?ref=eda, SnapEDA_Link=https://www.snapeda.com/parts/TPS73225DBVR/Texas%20Instruments/view-part/1237159/?ref=snap
U8: "200mA, Negative Output Low-Dropout Linear Regulator", Package="SOT-23-5 Texas Instruments", Availability=Unavailable, DigiKey-Purchase-URL=https://snapeda.com/shop?store=DigiKey&id=46470, MF="Texas Instruments", Mouser-Purchase-URL=https://snapeda.com/shop?store=Mouser&id=46470, MP=TPS72325DBVT, Price=None, SnapEDA_Link=https://www.snapeda.com/parts/TPS72325DBVT/Texas%20Instruments/view-part/46470/?ref=snap, Texas_Instruments-Purchase-URL=https://snapeda.com/shop?store=Texas+Instruments&id=46470
U9: "60mA Charge Pump Voltage Inverter with Fixed 250kHz Operation 5-SOT-23 -40 to 85", Package="SOT-23-5 Texas Instruments", Availability=Good, Check_prices=https://www.snapeda.com/parts/TPS60403DBVT/Texas%20Instruments/view-part/229700/?ref=eda, MF="Texas Instruments", MP=TPS60403DBVT, Price=None, Purchase-URL=https://pricing.snapeda.com/search/part/TPS60403DBVT/?ref=eda, SnapEDA_Link=https://www.snapeda.com/parts/TPS60403DBVT/Texas%20Instruments/view-part/229700/?ref=snap

## Via types
v1: diameter 0.635, hole 0.381, Top Layer to Bottom Layer, 194 vias
v2: diameter 1.016, hole 0.635, Top Layer to Bottom Layer, 33 vias
v3: diameter 1.27, hole 0.711, Top Layer to Bottom Layer, 17 vias
v4: diameter 1.27, hole 0.762, Top Layer to Bottom Layer, 8 vias
v5: diameter 1.27, hole 0.635, Top Layer to Bottom Layer, 2 vias

## Nets (pads, with @x,y where several pads share a name; then routed paths per layer and width w, separated by ;. In a path a pad name is that pad's centre, name@x,y a point inside that pad or via, vN(x,y) a via of type N, cw(c..) or ccw(c..) an arc to the next point about the centre after c; other vN are vias at no path point)
2.5V: C7.1 C8.1 C11.1 C12.1 C37.1 L1.2 U1.19 U1.21 U1.22 U1.54 U1.56 U1.59 U2.19 U2.21 U2.22 U2.54 U2.56 U2.59 | length 170.4
  Top Layer w0.254: v1(56.312,43.383) 56.312,43.399 56.635,43.722 U2.19@56.635,45.12 ; v1(56.312,93.015) 56.312,93.118 56.61,93.416 U1.19@56.61,94.98 ; U1.21@57.61,94.98 57.61,94.983 57.623,94.996 58.097,94.996 58.11,94.983 U1.22@58.11,94.98 58.11,93.329 57.861,93.08 v1(57.861,92.989) ; v1(57.937,43.358) 57.937,43.461 57.635,43.763 U2.21@57.635,45.12 U2.22@58.135,45.12 ; U1.59@58.11,106.34 58.11,108.707 v1(58.776,109.372) ; U2.59@58.135,56.48 58.135,58.923 58.776,59.563 v1(59.639,59.563) ; C8.1@58.76,111.303 58.776,111.288 v1(58.776,109.372) ; C11.1@59.554,60.444 59.63,60.444 59.635,60.439 59.635,59.567 v1(59.639,59.563) ; C11.1@59.554,61.105 59.554,63.305 C12.1@59.597,63.348 ; U1.56@59.61,106.34 59.61,108.538 v1(58.776,109.372) ; U2.56@59.635,56.48 59.635,59.559 v1(59.639,59.563) ; U1.54@60.61,106.34 60.61,108.87 v1(61.138,109.398) ; U2.54@60.635,56.48 60.635,58.197 62.027,59.588 v1(62.078,59.588)
  Top Layer w0.762: C8.1@58.735,111.328 58.735,113.563 C7.1@58.71,113.589 C7.1@58.801,113.68 ; C7.1@58.928,113.807 58.928,115.976 60.808,117.856 v3(67.894,117.856) 67.991,117.759 68.351,117.759 68.375,117.734 C37.1@74.356,117.734 ; v3(59.515,66.957) 59.556,66.917 C12.1@59.556,63.388 ; C37.1@74.325,117.627 C37.1@74.376,117.678 ; L1.2@74.412,114.732 C37.1@74.412,117.678
  Bottom Layer w0.254: v1(58.776,109.372) 61.112,109.372 v1(61.138,109.398) ; v1(59.639,59.563) 59.665,59.588 v1(62.078,59.588)
  Bottom Layer w0.762: v1(56.312,43.383) v1@57.937,43.383 ; v1@56.337,92.989 v1(56.312,93.015) 67.97,93.015 ; v1(57.937,43.358) 65.238,43.358 65.684,43.804 65.684,66.957 ; v3(59.515,66.957) 65.684,66.957 ; v3(67.894,117.856) 67.97,117.78 67.97,93.015 ; 65.684,66.957 66.754,66.957 67.97,68.174 67.97,93.015
3.3V: C26.1 C28.1 C29.1 C30.1 C35.1 C36.2 C42.2 C61.1 C62.2 D1.A R37.2 R38.2 R41.2 R43.2 R53.2 R55.2 R64.2 R67.2 R74.2 U1.48 U1.50 U2.48 U2.50 U3.2 U3.4 U4.2 | length 299
  Top Layer w0.254: U1.50@62.61,106.34 62.61,107.669 63.652,108.712 67.147,108.712 C26.1@67.437,109.002 67.676,108.763 69.459,108.763 C29.1@69.748,109.052 ; U2.50@62.635,56.48 62.635,57.53 63.043,57.937 C28.1@67.249,57.937 ; U1.48@65.04,104.41 69.815,104.41 71.145,105.74 71.145,108.788 70.747,109.187 C29.1@69.983,109.187 ; U2.48@65.065,54.55 66.918,54.55 67.283,54.915 v1(67.386,54.915) ; C28.1@67.528,58.303 67.285,58.547 v1(67.285,59.817) 67.305,59.838 67.305,60.92 R38.2@67.615,61.229 ; R37.2@67.762,113.944 70.282,113.944 71.425,112.801 71.425,111.277 v3(71.374,111.227) ; R41.2@76.363,84.48 v1(77.775,84.48) ; R43.2@76.363,91.465 v1(77.749,91.465) ; R53.2@76.454,34.62 76.556,34.519 v1(77.851,34.519) ; R55.2@76.454,41.605 76.53,41.681 v1(77.851,41.681) ; R67.2@88.494,29.972 88.671,30.15 90.044,30.15 ; D1.A@90.21,29.87 D1.A@90.438,30.099 ; R74.2@101.107,59.385 101.107,61.214
  Top Layer w0.711: C62.2@106.136,57.507 106.382,57.261 106.382,54.45 U4.2@106.477,54.356
  Top Layer w0.762: C28.1@67.615,58.303 C30.1@69.952,58.303 ; C30.1@69.889,58.363 C30.1@69.952,58.303 ; C29.1@69.983,109.187 69.848,109.052 C29.1@69.748,109.052 69.928,109.232 69.928,110.683 70.375,111.129 71.277,111.129 v3(71.374,111.227) ; v2(71.399,60.198) 71.384,60.182 70.398,60.182 69.952,59.736 C30.1@69.952,58.303 ; 84.301,64.213 84.303,64.211 ; 84.709,63.805 84.303,64.211 ; U3.4@85.504,103.683 89.193,103.683 ; v1@86.589,29.972 v1(86.563,29.947) R67.2@88.468,29.947 ; v3(87.185,61.582) 87.047,61.582 86.793,61.836 86.678,61.836 84.303,64.211 ; C35.1@89.66,93.277 C35.1@89.703,93.32 ; C35.1@89.972,93.051 C35.1@89.703,93.32 ; v1(91.059,69.926) R64.2@95.306,69.926 ; U3.2@92.194,103.683 89.193,103.683 ; v5(94.082,61.366) 94.179,61.269 94.538,61.269 94.593,61.214 101.107,61.214 105.312,61.214 105.728,60.798 C61.1@105.728,60.249 ; C61.1@105.601,60.249 105.865,59.985 105.865,59.231 105.867,59.228 105.867,58.423 105.867,57.976 106.136,57.707 C62.2@106.136,57.607 ; 84.303,64.211 v3(84.303,89.408) 84.303,92.329 85.293,93.32 C35.1@89.703,93.32 ; 89.193,103.683 C36.2@89.193,95.834 89.193,95.524 89.433,95.283 89.433,94.135 89.434,93.589 C35.1@89.703,93.32
  Bottom Layer w0.254: v1(67.285,59.817) 67.335,59.766 67.335,54.966 v1(67.386,54.915) ; 71.196,91.614 71.345,91.465
  Bottom Layer w0.762: v3(71.374,111.227) 71.374,91.465 ; 71.45,34.519 v1(77.851,34.519) ; v1(77.749,91.465) 71.374,91.465 ; v1(77.775,84.48) 71.374,84.48 ; v1(77.851,41.681) 71.399,41.681 ; v3(84.303,89.408) 84.353,89.357 84.353,84.709 76.606,76.962 71.399,76.962 71.374,76.987 ; v1(86.563,29.947) 85.573,30.937 72.949,30.937 71.399,32.487 71.399,34.519 71.399,41.681 ; v3(87.185,61.582) 91.059,61.582 ; v1(91.059,69.926) 91.059,61.582 ; v5(94.082,61.366) 93.944,61.366 93.729,61.582 91.059,61.582 ; 71.374,76.987 71.374,84.48 ; 71.374,76.987 71.374,60.223 v2(71.399,60.198) 71.399,41.681 ; 71.374,84.48 71.374,91.465
5V: C45.1 C46.2 C47.2 C48.2 C49.1 C50.1 C54.2 D4.A p4.VBUS R65.2 U3.3 U6.1 U6.3 U9.2 | length 64.9
  Top Layer w0.381: C54.2@94.374,93.878 94.374,92.425 94.597,92.202 99.644,92.202 100.887,90.96 102.184,90.96 ; R65.2@95.413,90.653 95.413,92.187 95.428,92.202 ; D4.A@102.159,89.571 102.184,89.597 102.184,90.96 ; p4.VBUS@104.602,90.96 102.184,90.96
  Top Layer w0.508: U6.3@83.657,118.578 83.657,119.555 83.955,119.852 85.26,119.852 85.557,119.555 U6.1@85.557,118.882 ; U6.1@85.557,118.578 U6.1@85.557,118.882 ; C49.1@90.155,117.399 89.879,117.675 89.879,118.584 89.581,118.882 U6.1@85.557,118.882 ; C50.1@99.084,103.363 99.48,103.759 99.777,103.759 101.542,103.759 101.839,103.461 101.839,102.616 U9.2@101.879,102.576
  Top Layer w0.762: C49.1@90.155,117.399 90.497,117.056 90.497,115.001 C48.2@90.665,114.833 ; C48.2@90.741,114.833 90.741,112.103 94.082,108.763 v4(94.082,105.867) ; U3.3@92.194,105.973 93.839,105.973 93.944,105.867 v4(94.082,105.867) ; C46.2@94.349,96.596 94.085,96.86 94.085,99.006 v4(94.056,99.035) 94.094,99.073 95.735,99.073 C45.1@95.773,99.111 ; C46.2@94.349,96.622 94.374,96.596 C54.2@94.374,93.878 ; C50.1@98.984,103.363 98.884,103.363 98.615,103.632 98.615,104.001 98.12,104.496 96.635,104.496 C47.2@96.393,104.254 96.132,104.254 95.868,104.518 95.868,105.421 95.421,105.867 v4(94.082,105.867)
  Bottom Layer w0.762: v4(94.056,99.035) 94.082,99.06 v4(94.082,105.867)
-2.5V: C3.1 C4.1 C5.1 C6.1 C9.2 C10.2 C13.2 C14.2 C15.2 C16.2 C17.2 C18.2 C19.2 C20.2 C21.2 C22.2 C23.2 C24.2 C25.2 C27.2 C53.1 L2.2 U1.20 U1.23 U1.25 U1.32 U1.53 U1.57 U1.58 U2.20 U2.23 U2.25 U2.32 U2.53 U2.57 U2.58 | length 299.8
  Top Layer w0.254: C5.1@54.856,37.636 C5.1@55.246,38.026 ; C6.1@55.143,40.716 55.143,41.605 55.651,42.113 56.54,42.113 57.135,42.708 U2.20@57.135,45.12 ; C3.1@55.23,88.087 C3.1@55.243,88.1 ; C4.1@55.397,90.653 55.778,91.033 55.778,91.313 57.11,92.644 U1.20@57.11,94.98 ; C9.2@57.595,38.151 57.677,38.233 C9.2@57.989,38.545 ; C10.2@57.646,88.113 57.775,88.242 C13.2@57.775,90.653 ; C13.2@57.699,90.653 57.777,90.731 57.777,91.635 58.61,92.468 U1.23@58.61,94.98 ; C14.2@57.785,41.005 57.823,41.005 58.208,41.39 58.208,41.749 58.635,42.176 U2.23@58.635,45.12 ; C9.2@57.858,38.773 57.858,40.571 C14.2@58.174,40.886 ; C9.2@57.964,38.291 C9.2@58.01,38.338 ; C9.2@58.01,37.877 C9.2@58.01,38.338 ; C9.2@58.01,38.545 C9.2@58.01,38.523 ; C9.2@58.039,38.595 C9.2@57.989,38.545 ; C9.2@58.064,37.389 C9.2@58.064,38.392 ; C9.2@58.08,38.407 C9.2@58.064,38.392 ; v1(58.826,108.102) 58.826,107.999 58.61,107.783 U1.58@58.61,106.34 U1.57@59.11,106.34 ; v1(58.852,58.623) 58.852,58.52 58.635,58.304 U2.58@58.635,56.48 59.122,56.48 59.135,56.493 U2.57@59.135,56.48 ; U1.25@59.61,94.98 59.61,92.943 61.846,90.707 62.674,90.707 C24.2@62.728,90.653 ; U2.25@59.635,45.12 59.635,43.057 61.766,40.927 62.455,40.927 C19.2@62.648,40.734 ; U1.53@61.11,106.34 61.11,108.1 v1(62.586,109.576) 63.254,110.244 63.254,110.92 C15.2@63.561,111.227 ; U2.53@61.135,56.48 61.148,56.493 61.148,57.643 63.348,59.842 v1(63.398,59.842) 63.398,60.782 C17.2@63.678,61.062 ; C19.2@62.521,40.759 62.521,35.499 62.53,35.49 C20.2@62.646,35.374 ; C22.2@62.65,85.344 62.65,90.233 62.728,90.155 C24.2@62.728,90.653 ; C24.2@62.728,90.685 C24.2@62.728,90.653 ; U1.32@63.11,94.98 63.11,94.04 63.322,93.828 67.147,93.828 C25.2@67.061,93.741 ; U2.32@63.135,45.12 63.135,44.18 63.525,43.79 67.02,43.79 67.488,44.257 v1(67.488,46.025) ; C16.2@63.561,113.538 C16.2@63.957,113.934 ; C17.2@63.721,61.105 63.721,63.33 C18.2@63.678,63.373 63.79,63.485 C18.2@64.017,63.712 ; C25.2@67.02,93.741 C25.2@67.061,93.741 ; C25.2@67.147,93.726 67.046,93.726 C25.2@67.061,93.741 ; C25.2@67.259,93.396 v1(68.961,93.396) ; C25.2@67.869,93.741 C25.2@67.061,93.741 ; C9.2@57.989,38.545 C9.2@58.01,38.523 ; C9.2@58.01,38.338 C9.2@58.01,38.523 ; C9.2@58.01,38.338 C9.2@58.064,38.392 ; C9.2@58.01,38.523 58.064,38.469 C9.2@58.064,38.392
  Top Layer w0.762: C4.1@55.255,90.449 55.243,90.437 55.243,88.1 55.243,84.127 56.439,82.931 57.709,82.931 ; C5.1@55.296,38.076 55.296,34.315 56.744,32.868 v3(62.433,32.868) 62.53,32.965 62.53,35.49 C19.2@62.53,40.617 ; C5.1@55.298,38.078 C6.1@55.298,40.466 ; 57.595,33.058 C9.2@57.595,38.151 ; C10.2@57.646,88.113 57.646,82.994 57.709,82.931 ; C9.2@57.677,38.233 57.677,40.685 C14.2@57.76,40.767 ; C22.2@62.65,85.344 62.586,85.28 62.586,82.931 57.709,82.931 ; 62.751,82.944 69.685,82.944 v3(69.698,82.956) ; C15.2@63.561,111.227 C16.2@63.561,113.538 63.561,115.148 64.338,115.926 v4(69.672,115.926) ; C18.2@63.79,63.485 63.79,64.73 64.237,65.176 v3(69.621,65.176) ; v3(94.869,115.926) 94.869,109.957 96.048,108.778 L2.2@97.521,108.778 97.521,107.381 99.088,105.813 100.13,105.813 C53.1@100.355,105.588
  Bottom Layer w0.254: v1(58.826,108.102) 61.112,108.102 v1(62.586,109.576) ; v1(58.852,58.623) 62.179,58.623 v1(63.398,59.842) ; v1(67.488,46.025) 69.621,46.025 ; v1(68.961,93.396) 68.986,93.421 69.685,93.421
  Bottom Layer w0.762: v3(62.433,32.868) 69.621,40.056 69.621,46.025 v3(69.621,65.176) 69.698,65.253 v3(69.698,82.956) 69.685,82.969 69.685,93.421 69.685,115.913 v4(69.672,115.926) v3(94.869,115.926)
-5V: C56.1 C57.2 C63.1 L3.2 U8.2 U8.3 | length 12
  Top Layer w0.508: U8.3@101.941,116.469 U8.2@101.941,115.519 103.266,115.519 103.701,115.084 104.616,115.084 C56.1@104.816,114.884
  Top Layer w0.762: C57.2@104.814,112.293 105.078,112.557 105.078,113.311 105.08,113.314 C56.1@105.08,114.615 ; C57.2@104.89,112.293 104.89,109.626 105.159,109.357 107.569,109.357 C63.1@107.594,109.383
BIAS_DRV: C2.1 R1.1 R35.1 U1.62 U1.63 U2.62 U2.63 | length 69.3
  Top Layer w0.254: R1.1@44.525,78.257 44.575,78.207 49.479,78.207 53.345,74.341 53.345,61.036 53.345,59.685 54.356,58.674 55.677,58.674 56.135,58.216 U2.63@56.135,56.48 U2.62@56.635,56.48 ; v1(52.172,109.068) 55.067,109.068 56.11,108.025 U1.63@56.11,106.34 U1.62@56.61,106.34 ; R35.1@52.807,63.383 R35.1@52.822,63.368
  Bottom Layer w0.254: v1(49.505,78.181) 49.505,106.401 v1(52.172,109.068)
BIASINV: C2.2 R35.2 U1.61 U2.61 | length 61.2
  Top Layer w0.254: v1(53.569,110.007) 55.118,110.007 57.11,108.016 U1.61@57.11,106.34 ; v1(53.645,84.201) 53.645,75.717 55.016,74.346 55.016,63.551 R35.2@55.245,63.322 55.245,60.586 55.262,60.569 55.262,60.054 57.135,58.181 U2.61@57.135,56.48 ; C2.2@55.093,61.468 C2.2@55.187,61.373
  Bottom Layer w0.254: v1(53.569,110.007) 53.607,109.969 53.607,84.239 v1(53.645,84.201)
Boot: Boot.2 Boot.4 C39.2 R67.1 U4.25 | length 63
  Top Layer w0.254: R67.1@88.494,31.872 88.494,34.214 ; v1(88.494,37.338) 88.494,34.214 ; C39.2@90.983,34.317 90.983,37.102 U4.25@91.237,37.356 ; C39.2@91.364,34.061 91.364,34.732 90.966,34.334 C39.2@90.846,34.214 88.494,34.214 ; Boot.2@100.211,72.883 100.482,72.612 v1(100.482,69.977)
  Top Layer w0.762: Boot.2@99.944,72.883 100.211,72.883 Boot.4@107.929,72.883
  Bottom Layer w0.254: v1(88.494,37.338) 88.519,37.313 90.068,37.313 96.368,43.612 96.368,67.767 98.577,69.977 v1(100.482,69.977)
CLK1: R57.1 U2.37 | length 11.2
  Top Layer w0.254: U2.37@65.065,49.05 65.078,49.063 66.842,49.063 66.855,49.05 70.686,49.05 73.508,46.228 R57.1@75.047,46.228
CLK2: R57.2 U1.37 | length 69.4
  Top Layer w0.254: U1.37@65.294,98.91 71.117,98.91 73.508,96.52 76.581,96.52 79.781,93.32 79.781,62.687 v1(82.194,60.274) ; R57.2@76.454,46.228 v1(80.162,46.228)
  Bottom Layer w0.254: v1(80.162,46.228) 80.162,58.242 v1(82.194,60.274)
CLKSEL1: R38.1 U2.52 | length 8
  Top Layer w0.254: U2.52@61.635,56.48 61.648,56.493 61.648,57.432 62.713,58.496 65.202,58.496 65.749,59.044 R38.1@65.749,61.355
CLKSEL2: R36.2 R37.1 U1.52 | length 10.5
  Top Layer w0.254: U1.52@61.61,106.34 61.61,107.381 63.627,109.398 64.897,109.398 65.862,110.363 R36.2@65.862,111.491 ; R37.1@65.583,114.224 R37.1@65.862,113.944 R36.2@65.862,111.491 ; R36.2@65.852,111.481 R36.2@65.862,111.491
D\R\D\Y\1: R39.2 U4.18 | length 23.3
  Top Layer w0.254: R39.2@74.661,62.281 76.327,62.281 86.208,52.4 86.208,49.428 87.875,47.761 U4.18@90.237,47.761
D\R\D\Y\2: R49.2 U4.7 | length 70.6
  Top Layer w0.254: 77.023,110.007 77.521,110.007 83.083,104.445 83.083,64.059 86.639,60.503 93.04,60.503 97.155,56.388 99.492,56.388 100.127,55.753 U4.7@100.127,54.356
D\R\D\Y\10: R39.1 U2.47 | length 14
  Top Layer w0.254: U2.47@65.065,54.05 70.052,54.05 71.857,55.855 71.857,58.572 72.847,59.563 R39.1@72.847,61.874
D\R\D\Y\20: R49.1 R50.1 U1.47 | length 16.4
  Top Layer w0.254: U1.47@65.04,103.91 70.662,103.91 71.73,104.978 71.73,108.102 73.276,109.648 74.231,109.648 R49.1@74.539,109.957 ; R49.1@74.463,109.957 R50.1@74.463,112.534
DAISY: R61.1 U2.41 | length 11.9
  Top Layer w0.254: U2.41@65.065,51.05 69.389,51.05 73.672,55.333 75.008,55.333 R61.1@75.047,55.372 ; R61.1@74.894,55.829 R61.1@74.996,55.931
DIAISY/DOUT: R51.1 R61.2 U1.43 | length 64.9
  Top Layer w0.254: U1.43@65.04,101.91 65.042,101.908 66.977,101.908 v1(66.98,101.905) 70.891,101.905 v1@72.514,103.527 ; v1(66.878,96.749) 67.716,96.749 71.349,93.116 71.349,79.146 72.415,78.08 75.298,75.197 75.298,68.567 v1(75.311,68.555) ; v1@72.465,103.478 72.465,103.91 73.606,105.051 74.18,105.051 74.463,105.334 R51.1@74.488,105.334 ; R51.1@74.463,105.207 R51.1@75.037,105.207 ; R61.2@76.454,55.372 76.53,55.296 v1(77.851,55.296)
  Bottom Layer w0.254: v1(66.878,96.749) 66.929,96.799 66.929,101.854 v1(66.98,101.905) ; v1(75.311,68.555) 75.311,57.836 v1(77.851,55.296)
  other v1: 72.441,103.454
DIN1: R52.1 U2.34 | length 24.7
  Top Layer w0.254: U2.34@65.065,47.55 68.934,47.55 71.222,45.263 71.222,32.283 73.635,29.87 R52.1@74.879,29.87
DIN2: R40.1 U1.34 | length 23.8
  Top Layer w0.254: U1.34@65.04,97.41 67.944,97.41 72.415,92.939 72.415,80.95 73.58,79.785 74.358,79.785 R40.1@74.463,79.68
DNeg: p4.D- U5.16 | length 18
  Top Layer w0.381: U5.16@96.539,82.543 96.539,84.568 97.028,85.057 v1(97.028,86.055) ; p4.D-@104.602,91.61 106.409,91.61 v1(106.807,91.211)
  Bottom Layer w0.381: v1(97.028,86.055) 97.612,86.055 102.768,91.211 v1(106.807,91.211)
DOUT1: R62.1 U2.43 | length 12.4
  Top Layer w0.254: U2.43@65.065,52.05 69.551,52.05 73.304,55.804 73.304,56.794 73.672,57.162 74.058,57.162 R62.1@74.554,57.658
DPos: p4.D+ U5.15 | length 19
  Top Layer w0.381: U5.15@97.189,82.543 97.199,82.552 97.199,84.143 97.866,84.811 97.866,87.45 97.864,87.453 97.864,87.632 v1(97.815,87.681) ; p4.D+@104.602,92.26 v1@107.017,92.26
  Bottom Layer w0.381: v1(97.815,87.681) 97.864,87.729 98.143,87.729 102.489,92.075 106.764,92.075 106.967,92.278 v1(107.036,92.278)
EN: C55.2 EN.2 EN.4 R74.1 U4.3 | length 41.6
  Top Layer w0.254: v1(99.111,68.707) 99.085,68.732 99.085,69.85 99.089,69.853 99.089,71.015 98.12,71.984 98.12,79.527 98.538,79.945 99.869,79.945 EN.2@100.021,80.097 ; R74.1@103.007,59.385 R74.1@103.363,59.385 ; v1(104.47,59.36) 104.445,59.385 R74.1@103.363,59.385 ; U4.3@105.207,54.356 104.978,54.585 104.978,56.21 104.27,56.918 103.546,56.918 103.388,57.075 103.388,57.175 103.363,57.201 R74.1@103.363,59.385
  Top Layer w0.762: EN.2@100.021,80.097 EN.4@108.005,80.097 108.219,80.097 EN.4@108.28,80.035
  Bottom Layer w0.254: v1(99.111,68.707) 100.355,68.707 104.47,64.592 v1(104.47,59.36)